# EAGLE board fisk-batt-4 (EAGLE 7.6.0)
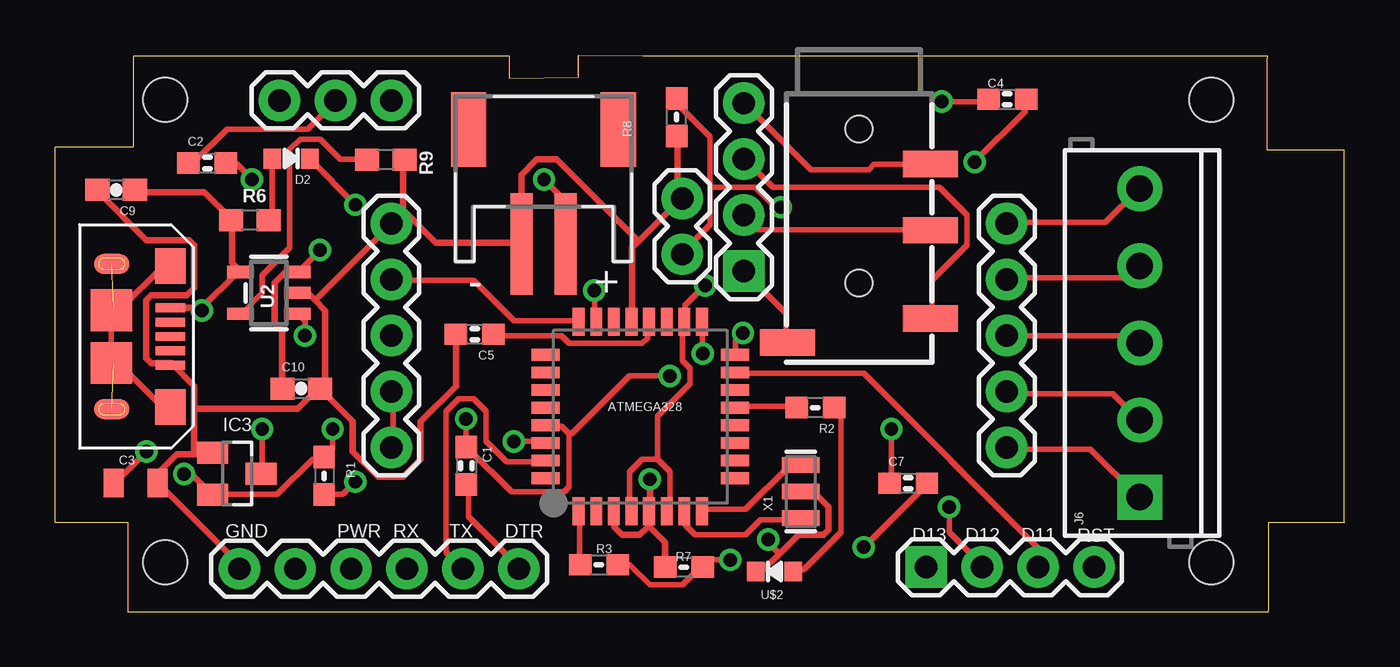
[diagram p0: board, top side]
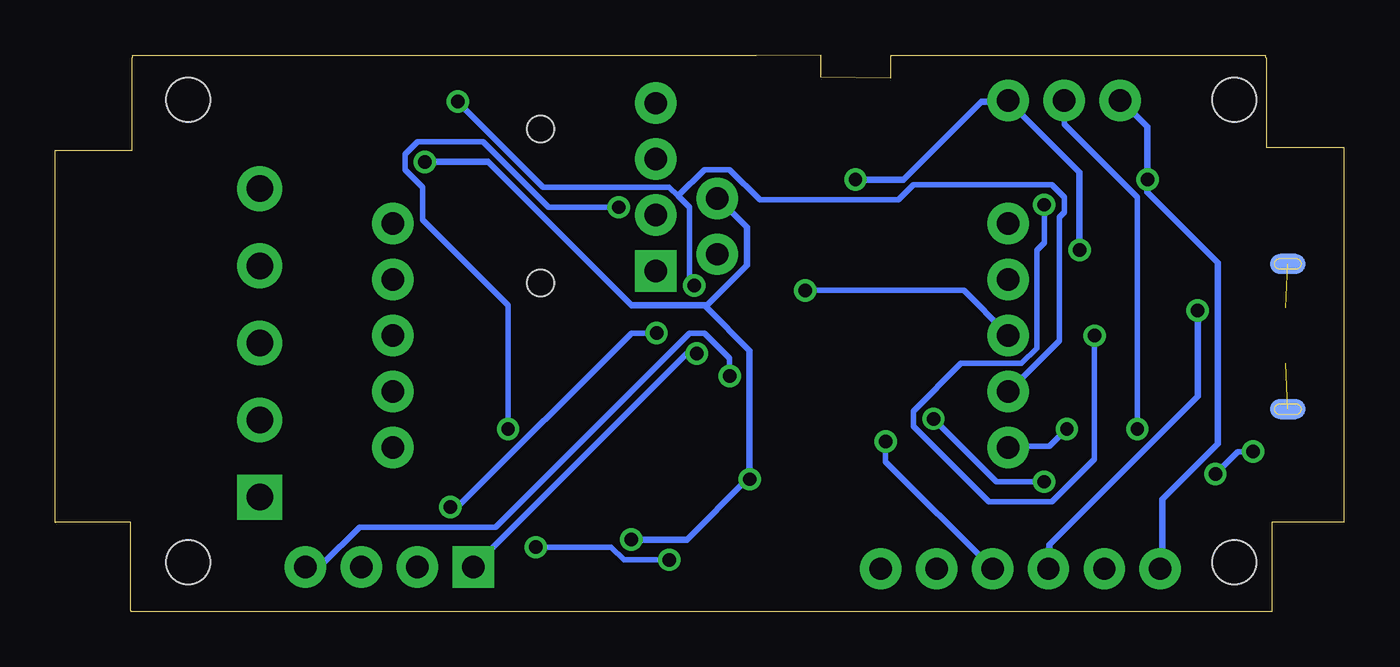
[diagram p1: board, bottom side, seen from below]

Size 58.55 x 25.28 mm. Coordinates in mm from the lower left corner, seen from the top.
Outline: 3.3,0 3.3,4.06 0,4.06 0,21.08 3.56,21.08 3.56,25.15
Outline: 55.12,0.05 55.12,4.06 58.55,4.06
Outline: 58.55,4.06 58.55,4.05
Outline: 3.3,0 55.1,0 55.1,0.05
Outline: 58.55,4.06 58.55,20.95 55.05,20.95 55.05,25.15
Outline: 3.56,25.15 3.56,25.25 20.61,25.25 20.61,24.23 23.78,24.26 23.78,25.28 26.7,25.25 55.05,25.25 55.05,25.15
Copper layers (1*16): Top 0.035mm / dielectric 1.5mm / Bottom 0.035mm
Design rules "default": minimum track width 10mil, minimum drill 24mil, track to track 8mil, track to pad 8mil, pad to pad 8mil, via to via 8mil, smd to smd 8mil, copper to edge 40mil, drill to drill 8mil, minimum pad ring 10mil, minimum via ring 8mil, stop-mask expansion 4mil, vias tented up to drill 0mil, thermal gap 10mil
Net classes: 1 power: width 0.305 mm
Holes 2 mm at 5,2.25 5,23.25 52.5,2.25 52.5,23.25

## Footprints (pad centres in the part's own frame; a part is rotated, then mirrored left to right if it is on the bottom)
TQFP32-08 = smd 1.27 x 0.533: 1 -4.293,2.8; 2 -4.293,2; 3 -4.293,1.2; 4 -4.293,0.4; 5 -4.293,-0.4; 6 -4.293,-1.2; 7 -4.293,-2; 8 -4.293,-2.8; 17 4.293,-2.8; 18 4.293,-2; 19 4.293,-1.2; 20 4.293,-0.4; 21 4.293,0.4; 22 4.293,1.2; 23 4.293,2; 24 4.293,2.8 | smd 0.533 x 1.27: 9 -2.8,-4.293; 10 -2,-4.293; 11 -1.2,-4.293; 12 -0.4,-4.293; 13 0.4,-4.293; 14 1.2,-4.293; 15 2,-4.293; 16 2.8,-4.293; 25 2.8,4.293; 26 2,4.293; 27 1.2,4.293; 28 0.4,4.293; 29 -0.4,4.293; 30 -1.2,4.293; 31 -2,4.293; 32 -2.8,4.293
0603-CAP = smd 1.016 x 0.965: 1 -0.85,0; 2 0.85,0
0805-CAP = smd 0.902 x 1.3: 1 -1,0; 2 1,0
0603-CAP' = smd 1.1 x 1: 1 -0.85,0; 2 0.85,0
JST-PH-2-SMT-RA = smd 1 x 4.6: 1 1,-3.7; 2 -1,-3.7 | smd 1.6 x 3.4: NC1 -3.4,1.5; NC2 3.4,1.5
0603-LED = smd 0.8 x 0.9: MINUS -0.85,0; PLUS 0.85,0
1X06 = drill 1.016 pad 1.88: 1 0,0; 2 2.54,0; 3 5.08,0; 4 7.62,0; 5 10.16,0; 6 12.7,0
SOT23 = smd 1 x 1.4: 1 -0.95,-1.1; 2 0.95,-1.1; 3 0,1.1
1X02 = drill 1.016 pad 1.88: 1 0,0; 2 2.54,0
1X04 = drill 1.016 pad 1.88 square: 1 0,0 | drill 1.016 pad 1.88: 2 2.54,0; 3 5.08,0; 4 7.62,0
1X05 = drill 1.016 pad 1.88: 1 0,0; 2 2.54,0; 3 5.08,0; 4 7.62,0; 5 10.16,0
SCREWTERMINAL-3.5MM-5 = drill 1.2 pad 2.032 square: 1 0,0 | drill 1.2 pad 2.032: 2 3.5,0; 3 7,0; 4 10.5,0; 5 14,0
MICROUSB-RIGHT = smd 0.4 x 1.35: 1 -1.3,1.27; 2 -0.65,1.27; 3 0,1.27; 4 0.65,1.27; 5 1.3,1.27 | smd 0.9 x 1.6: S1 -3.3,-1.4; S2 3.3,-1.4 | smd 1.6 x 1.4: S3 -3.2,1.27; S4 3.2,1.27 | smd 1.9 x 1.9: S5 -1.2,-1.405; S6 1.2,-1.405 | smd 0.9 x 1.6 bottom: S7 -3.3,-1.4; S8 3.3,-1.4
1X03 = drill 1.016 pad 1.88: 1 0,0; 2 2.54,0; 3 5.08,0
AUDIO-JACK-TRRS-SMD = smd 1.2 x 2.5: EARTH 11.3,-3.25; RING1 6.2,3.25; RING2 3.2,3.25; TIP 10.2,3.25 | hole 1.2: 1.6,0; 8.6,0
0603-RES = smd 1.016 x 0.965: 1 -0.85,0; 2 0.85,0
0603-NO = smd 1.1 x 1: 1 -0.85,0; 2 0.85,0
SOT23-5 = smd 0.55 x 1.2: 1 -0.95,-1.3; 2 0,-1.3; 3 0.95,-1.3; 4 0.95,1.3; 5 -0.95,1.3
RESONATOR-SMD = smd 0.7 x 1.7: 1 -1.2,0; 2 0,0; 3 1.2,0

## Placement (x,y rotation side)
ATMEGA328  ATMega-328  [TQFP32-08]  26.57,8.87 90 top
C1  0.1  [0603-CAP]  18.68,6.63 270 top
C2  1u  [0603-CAP]  6.92,20.37 0 top
C3  10u  [0805-CAP]  3.66,5.84 0 top
C4  0.1  [0603-CAP]  43.24,23.27 0 top
C5  0.1  [0603-CAP]  19.06,12.6 180 top
C7  0.47uF  [0603-CAP]  38.74,5.84 0 top
C9  10uF  [0603-CAP']  2.77,19.15 180 top
C10  10uF  [0603-CAP']  11.18,10.14 0 top
CNL1  [JST-PH-2-SMT-RA]  22.18,20.4 0 top
D2  LED0603  [0603-LED]  10.73,20.58 180 top
FTDI  FTDI  [1X06]  8.36,1.96 0 top
IC3  MCP1703CB  [SOT23]  8.26,6.28 270 top
J1  [1X02]  28.48,16.23 90 top
J2  [1X04]  31.27,15.47 90 top
J3  [1X05]  15.27,17.63 270 top
J4  [1X05]  43.21,17.63 270 top
J5  [1X04]  39.55,2.03 0 top
J6  [SCREWTERMINAL-3.5MM-5]  49.26,5.21 90 top
J7  [MICROUSB-RIGHT]  3.97,12.5 270 top
J10  [1X03]  10.19,23.22 0 top
JP1  AUDIO-JACK3  [AUDIO-JACK-TRRS-SMD]  36.51,23.52 270 top
R1  10k  [0603-RES]  12.22,6.17 270 top
R2  1k5  [0603-RES]  34.52,9.27 180 top
R3  10k  [0603-RES]  24.7,2.14 0 top
R6  10K  [0603-NO]  8.85,17.78 180 top
R7  4.7k  [0603-RES]  28.56,2.03 0 top
R8  10k  [0603-RES]  28.23,22.46 90 top
R9  4.7K  [0603-NO]  15.02,20.53 180 top
U2  MCP73831T-2ACI/OT  [SOT23-5]  9.71,14.48 90 top
U$2  LED0603  [0603-LED]  32.67,1.83 0 top
X1  16 MHz  [RESONATOR-SMD]  33.86,5.46 90 top

## Library data of the parts
ATMEGA328 C1-C5 C7 D2 R1-R3 R7 R8 U$2 = LowPowerLab
C9 C10 X1 = SparkFun
CNL1 = adafruit
FTDI J1 J3 J4 J10 JP1 = SparkFun-Connectors
IC3 = linear
J2 J5 = SparkFun-Connectors; PROD_ID: CONN-09696
J6 = SparkFun-Connectors; PROD_ID: Combine 8288+8399
J7 = MF_Connectors
R6 R9 U2 = microbuilder

## Nets
A0: ATMEGA328.23 J3.3
A1: ATMEGA328.24 J3.2
A2: ATMEGA328.25
A3: ATMEGA328.26
A4_SDA: ATMEGA328.27
A5_SCL: ATMEGA328.28
A6: ATMEGA328.19
A7: ATMEGA328.22
AREF: ATMEGA328.20 C5.1
D0_RX: ATMEGA328.30 FTDI.4
D1_TX: ATMEGA328.31 FTDI.5
D2: ATMEGA328.32
D3: ATMEGA328.1 R3.1
D4: ATMEGA328.2
D5: ATMEGA328.9
D6: ATMEGA328.10
D7: ATMEGA328.11
D8: ATMEGA328.12
D9: ATMEGA328.13 R2.2
D10_SS: ATMEGA328.14
D11_MOSI: ATMEGA328.15 J5.3
D12_MISO: ATMEGA328.16 J5.2
D13_SCK: ATMEGA328.17 J5.1
GND [power]: ATMEGA328.3 ATMEGA328.5 ATMEGA328.21 C2.2 C3.2 C4.2 C5.2 C9.2 C10.2 CNL1.2 FTDI.1 IC3.1 J1.2 J3.1 J7.5 J10.1 R7.1 R8.1 R9.1 U2.2 U$2.MINUS X1.2
N$1: ATMEGA328.7 X1.1
N$2: R2.1 U$2.PLUS
N$3: C7.2 R3.2 R7.2
N$4: C7.1 J1.1 R8.2
N$5: J2.1 JP1.EARTH
N$6: J2.2 JP1.RING1
N$7: J2.3 JP1.TIP
N$8: J2.4 JP1.RING2
N$9: J4.5 J6.1
N$10: J4.4 J6.2
N$11: J4.3 J6.3
N$12: J4.2 J6.4
N$13: J4.1 J6.5
N$16: R9.2 U2.5
N$17: D2.MINUS U2.1
N$18: D2.PLUS R6.1
N$20: C1.2 FTDI.6
N$21: ATMEGA328.8 X1.3
PWR [power]: C9.1 FTDI.3 J7.1 R6.2 U2.4
RST: ATMEGA328.29 C1.1 J5.4 R1.2
SLD: J7.S1 J7.S2 J7.S3 J7.S4 J7.S5 J7.S6 J7.S7 J7.S8
VBAT [power]: C10.1 CNL1.1 J10.3 U2.3
VCC: ATMEGA328.4 ATMEGA328.6 ATMEGA328.18 C3.1 C4.1 IC3.2 J3.4 J3.5 R1.1
VIN: C2.1 IC3.3 J10.2

## Tracks (layer width: path | path; a pad name or v marks a point on that pad's centre or on a via)
A0  (via drill 0.61)
  Top 0.254: v24.49,14.59 24.49,13.22 ATMEGA328.23
  Bottom 0.254: v24.49,14.59 17.29,14.59 15.35,12.65 J3.3
A1
  Top 0.254: ATMEGA328.24 23.69,13.22 20.83,13.22 19.01,15.05 15.35,15.05 J3.2
AREF
  Top 0.254: C5.1 19.92,12.54 23.01,12.54 23.35,12.19 26.66,12.19 26.89,12.42 26.89,13.11 ATMEGA328.20
D0_RX  (via drill 0.61)
  Top 0.254: v20.83,7.74 22.21,7.74 ATMEGA328.30
  Bottom 0.254: v20.83,7.74 20.83,6.82 16.03,2.02 FTDI.4
D1_TX
  Top 0.254: ATMEGA328.31 22.21,6.82 20.49,6.82 19.58,7.74 19.58,9.11 19.01,9.68 18.32,9.68 17.75,9.11 17.75,2.71 18.43,2.02 FTDI.5
D3
  Top 0.254: R3.1 23.81,2.14 23.81,4.54 ATMEGA328.1
D9
  Top 0.254: R2.2 33.64,9.34 30.89,9.34 ATMEGA328.13
D11_MOSI
  Top 0.254: ATMEGA328.15 30.89,10.82 36.72,10.82 44.61,2.94 44.61,2.14 J5.3
D12_MISO  (via drill 0.61)
  Top 0.254: v31.24,12.65 30.89,12.31 30.89,11.74 ATMEGA328.16 | v40.61,4.76 40.61,3.62 42.09,2.14 J5.2
  Bottom 0.254: v31.24,12.65 32.38,12.65 40.27,4.76 v40.61,4.76
D13_SCK  (via drill 0.61)
  Top 0.254: v29.41,11.74 29.41,13.11 ATMEGA328.17
  Bottom 0.254: v29.41,11.74 29.86,11.74 39.47,2.14 J5.1
GND  (via drill 0.61)
  Top 0.305: 32.89,2.65 33.75,3.51 34.89,3.51 35.12,3.74 35.12,4.76 34.44,5.45 X1.2 | 32.89,2.65 32.15,1.91 31.92,1.91 U$2.MINUS | 27.01,3.85 27.69,3.17 27.69,2.14 R7.1 | 27.01,3.85 27.01,4.54 ATMEGA328.5 27.01,4.65 v27.01,6.02 | ATMEGA328.3 25.41,4.54 25.41,3.85 25.75,3.51 26.55,3.51 26.89,3.85 27.01,3.85 | R8.1 28.26,21.57 28.26,18.94 28.38,18.82 J1.2 28.38,18.71 26.49,16.82 | v41.75,20.42 44.04,22.71 44.04,23.17 C4.2 | 26.49,16.82 26.21,16.54 26.21,13.22 ATMEGA328.21 | 32.89,2.65 32.38,3.17 v32.38,3.28 | R9.1 15.8,20.42 15.8,18.14 15.35,17.68 J3.1 | C5.2 18.21,12.54 18.21,10.25 16.6,8.65 16.6,6.94 15.8,6.14 14.66,6.14 13.52,7.28 13.52,8.65 C10.2 | U2.2 11.46,14.48 11.8,14.14 | 11.8,14.14 12.26,13.68 12.26,10.48 12.03,10.25 C10.2 | 11.8,14.14 15.23,17.57 J3.1 | J3.1 15.92,18.14 17.29,16.77 21.18,16.77 CNL1.2 21.18,16.88 21.18,19.85 21.86,20.54 22.78,20.54 26.49,16.82 | v8.95,19.62 8.26,20.31 7.8,20.31 C2.2 | 6.32,7.17 7.12,7.17 IC3.1 | 6.32,7.17 5.52,7.17 4.72,6.36 4.72,5.91 C3.2 4.72,5.79 8.26,2.25 8.26,2.02 FTDI.1 | C9.2 1.97,19.05 4.15,16.88 6.09,16.88 6.32,16.65 6.32,14.71 5.98,14.37 4.37,14.37 4.15,14.14 4.15,11.51 4.37,11.28 5.18,11.28 J7.5 5.29,11.28 6.32,10.25 6.32,9.22 | 6.32,9.22 6.32,7.17 | 6.32,9.22 11,9.22 11.92,10.14 C10.2
  Bottom 0.305: v41.75,20.42 38.89,20.42 32.38,13.91 28.95,13.91 | 28.95,13.91 27.12,15.74 27.12,17.45 28.38,18.71 J1.2 | 28.95,13.91 28.95,13.79 27.01,11.85 v27.01,6.02 27.12,6.02 29.86,3.28 v32.38,3.28 | J10.1 10.09,23.17 8.95,22.02 v8.95,19.62 8.95,19.05 5.75,15.85 5.75,7.62 8.26,5.11 8.26,2.02 FTDI.1
N$1
  Top 0.254: ATMEGA328.7 28.61,4.54 28.61,3.97 29.06,3.51 31.35,3.51 32.04,4.19 33.86,4.19 X1.1
N$2
  Top 0.254: U$2.PLUS 33.52,1.91 33.98,1.91 35.69,3.62 35.69,8.99 35.46,9.22 R2.1
N$3  (via drill 0.61)
  Top 0.254: R3.2 26.09,2.14 27.01,1.22 28.49,1.22 29.29,2.02 R7.2 29.52,2.02 29.86,2.37 v30.66,2.37 | v36.72,2.94 39.58,5.79 C7.2
  Bottom 0.254: v36.72,2.94 33.29,2.94 32.72,2.37 v30.66,2.37
N$4  (via drill 0.61)
  Top 0.254: 29.75,19.28 29.75,17.57 28.49,16.31 J1.1 | 29.75,19.28 29.75,21.57 28.26,23.05 28.26,23.28 R8.2 | v37.98,8.31 37.98,5.91 C7.1 | v32.95,18.37 32.72,18.37 31.81,19.28 29.75,19.28
  Bottom 0.254: v37.98,8.31 37.98,13.91 41.87,17.8 41.87,19.28 42.67,20.08 42.67,20.77 42.09,21.34 39.12,21.34 36.15,18.37 v32.95,18.37
N$5
  Top 0.254: J2.1 33.18,13.57 33.18,12.31 JP1.EARTH
N$6
  Top 0.254: JP1.RING1 39.69,17.34 31.92,17.34 31.35,17.91 J2.2
N$7
  Top 0.254: JP1.TIP 39.81,13.34 39.81,15.05 41.41,16.65 41.41,18.02 40.15,19.28 32.61,19.28 31.35,20.54 J2.3
N$8
  Top 0.254: JP1.RING2 39.69,20.31 37.18,20.31 36.95,20.08 34.32,20.08 31.35,23.05 J2.4
N$9
  Top 0.254: J4.5 43.24,7.39 47.01,7.39 49.18,5.22 J6.1
N$10
  Top 0.254: J4.4 43.24,9.91 48.04,9.91 49.18,8.76 J6.2
N$11
  Top 0.254: J4.3 43.24,12.54 48.95,12.54 49.18,12.31 J6.3
N$12
  Top 0.254: J4.2 43.24,15.17 48.72,15.17 49.18,15.62 J6.4
N$13
  Top 0.254: J4.1 43.24,17.68 47.69,17.68 49.18,19.17 J6.5
N$16
  Top 0.254: R9.2 14.09,20.54 12.95,20.54 12.03,21.45 11.12,21.45 10.66,21 10.66,16.54 9.4,15.28 9.4,14.48 8.49,13.57 U2.5
N$17  (via drill 0.61)
  Top 0.254: v13.63,18.48 11.58,20.54 D2.MINUS | v11.35,12.54 11.35,13.22 11.12,13.45 U2.1
  Bottom 0.254: v13.63,18.48 13.63,16.77 13.98,16.42 13.98,11.97 14.66,11.28 17.41,11.28 19.58,9.11 19.58,8.42 16.15,4.99 13.29,4.99 11.35,6.94 v11.35,12.54
N$18
  Top 0.254: D2.PLUS 9.86,20.54 9.86,17.91 9.75,17.8 R6.1
N$20
  Top 0.254: C1.2 18.78,5.68 18.78,4.31 21.06,2.02 FTDI.6
N$21
  Top 0.254: ATMEGA328.8 29.41,4.65 31.35,4.65 33.29,6.59 33.86,6.59 X1.3
PWR  (via drill 0.61)
  Top 0.305: C9.1 3.69,19.05 6.78,19.05 7.92,17.91 R6.2 8.03,17.68 8.03,15.85 8.38,15.51 U2.4 8.26,15.39 6.66,13.79 | 6.66,13.79 5.29,13.79 J7.1 | v6.66,13.68 6.66,13.79
  Bottom 0.305: v6.66,13.68 6.66,9.79 13.4,3.05 13.4,2.02 FTDI.3
RST  (via drill 0.61)
  Top 0.254: v13.63,5.91 13.06,5.34 12.26,5.34 R1.2 | v18.66,8.76 18.66,7.51 C1.1 18.78,7.39 20.72,5.45 23.12,5.45 23.35,5.68 23.35,8.08 | 23.35,8.08 23.01,8.42 22.32,8.42 ATMEGA328.29 | v27.92,10.71 26.09,10.71 23.46,8.08 23.35,8.08
  Bottom 0.254: v13.63,5.91 15.8,5.91 v18.66,8.76 | v27.92,10.71 27.92,11.51 29.06,12.65 29.75,12.65 38.55,3.85 44.72,3.85 46.44,2.14 47.12,2.14 J5.4
SLD  (4 unrouted)
  Top 0.254: J7.S4 5.18,9.34 4.83,9.34 2.89,11.28 2.66,11.28 J7.S6 2.55,11.39 2.55,13.68 J7.S5 2.66,13.79 3,13.79 4.83,15.62 5.18,15.62 J7.S3
VBAT  (via drill 0.61)
  Top 0.305: C10.1 10.32,10.14 10.32,12.77 9.98,13.11 9.98,14.94 10.43,15.39 11,15.39 U2.3 11.12,15.51 v12.03,16.42 | v22.21,19.62 23.12,18.71 23.12,16.77 CNL1.1
  Bottom 0.305: v12.03,16.42 12.03,19.97 15.23,23.17 J10.3 15.35,23.17 16.49,23.17 20.03,19.62 v22.21,19.62
VCC  (via drill 0.61)
  Top 0.254: J3.5 15.35,7.51 15.35,9.91 J3.4 | v4.15,7.28 2.77,5.91 C3.1 | v5.86,6.25 6.2,6.25 7.12,5.34 IC3.2 7.23,5.34 10.09,5.34 11.69,6.94 12.15,6.94 R1.1 12.26,7.05 12.6,7.39 v12.6,8.31 | 27.35,6.94 26.66,6.94 26.09,6.36 26.09,4.65 ATMEGA328.4 | 27.35,6.94 27.92,6.36 27.92,4.76 27.81,4.65 ATMEGA328.6 | v40.27,23.17 42.32,23.17 C4.1 | v29.52,14.82 28.61,13.91 28.61,13.22 ATMEGA328.18 28.49,13.11 28.49,11.39 28.84,11.05 28.84,10.37 27.35,8.88 27.35,6.94
  Bottom 0.254: v4.15,7.28 4.83,7.28 v5.86,6.25 | v12.6,8.31 13.4,7.51 15.23,7.51 J3.5 | v40.27,23.17 36.38,19.28 30.66,19.28 30.26,18.88 | 30.26,18.88 29.75,18.37 29.75,15.05 v29.52,14.82 | 30.26,18.88 29.06,20.08 27.92,20.08 26.55,18.71 20.26,18.71 19.58,19.4 13.29,19.4 12.72,18.82 12.72,18.14 12.95,17.91 12.95,12.31 15.23,10.02 J3.4
VIN  (via drill 0.61)
  Top 0.254: C2.1 6.09,20.42 6.32,20.42 7.8,21.91 11.46,21.91 12.72,23.17 J10.2 | v9.4,8.31 9.4,6.36 IC3.3
  Bottom 0.254: v9.4,8.31 9.4,18.82 12.72,22.14 12.72,23.17 J10.2

## Text on the board
tPlace: GND | PWR | RX | TX | DTR | RST | D13 | D12 | D11